# Altium PCB Main.PcbDoc
Units mil, origin at the board's own origin, x right, y up, seen from the top; angles counter-clockwise.
Board outline 6000 x 4000 mil, 2 copper layers (Top Layer, Bottom Layer); 6 components, 5 nets, 14 pads, 0 vias.
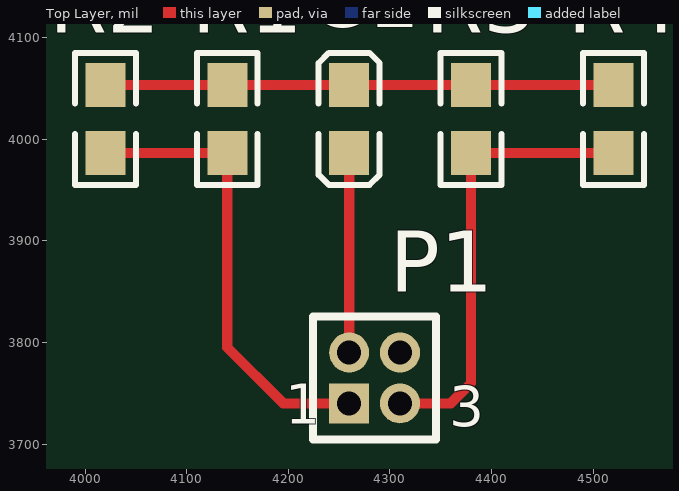
[diagram p0: Top Layer view]
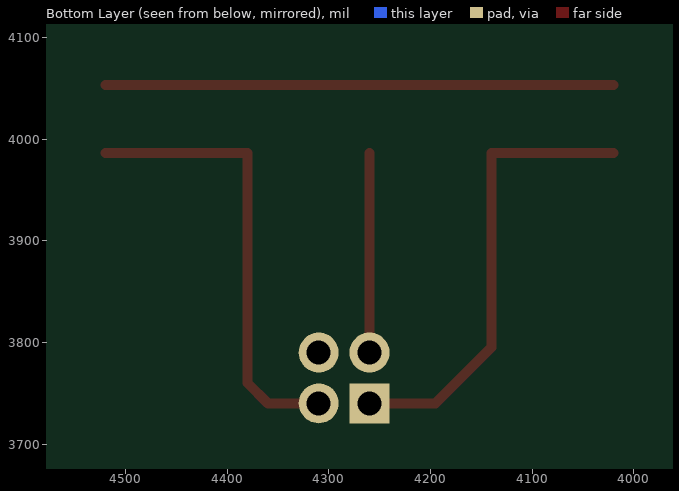
[diagram p1: Bottom Layer view, seen from below]

## Layer stack, top to bottom
Top Layer: signal copper 1.4
Dielectric: dielectric 12.6, FR-4, Dk 4.8
Bottom Layer: signal copper 1.4

## Board outline
1000,1000 7000,1000 7000,5000 1000,5000

## Design rules (kind name [scope] priority, off if disabled: settings)
Clearance [All] p1: gap=10
PolygonConnect [All] p1: connectstyle=Relief reliefconductorwidth=10 reliefentries=4 polygonreliefangle="90 Angle"
RoutingVias [All] p1: holewidth=28 width=50 viastyle="Through Hole" minholewidth=28 minwidth=50 maxholewidth=28 maxwidth=50
SilkscreenOverComponentPads [All] p1: minsilkscreentomaskgap=10
SolderMaskExpansion [All] p1: expansion=4
Width [All] p1: maxlimit=10 minlimit=10 preferedwidth=10
27 further rules are at their usual default settings.

## Components (designator, comment, footprint, x,y, rotation, side; value= is the part's Value field where it differs from the comment)
C1 "10nF" CC0603 4260,4020 r90 top
P1 "MHDR2X2" MHDR2X2 4260,3740 r0 top
R1 "120R" R0603 4140,4020 r90 top
R2 "120R" R0603 4020,4020 r90 top
R3 "120R" R0603 4380,4020 r270 top
R4 "120R" R0603 4520,4020 r270 top

## Footprints (in the part's own frame and the unit in brackets; to place one, negate y for a bottom-side part, rotate by r counter-clockwise, add the part's x,y. Pads: shape width x height; smd on the part's side, far side on the other; paste and mask are expansions set on the pad)
CC0603 [mm] "Chip Capacitor; Body 1.6 x 0.8 mm (LxW typ)"
  rect 1.1x1 smd: 1(-0.85,0) 2(0.85,0)
  silkscreen extent -1.65,-0.76 1.65,0.76, body extent -1.5,-0.6 1.5,0.6, height 1.35
MHDR2X2 [mm] "Connector; Header; 2x2 Position"
  rect 1x1 hole 0.6: 1(0,0)
  round 1 hole 0.6: 2(0,1.27) 3(1.27,0) 4(1.27,1.27)
  silkscreen extent -0.9,-0.9 2.17,2.17
R0603 [mm] "Chip Resister; Body 1.6 x 0.8 mm (LxW typ)"
  rect 1.1x1 smd: 1(-0.85,0) 2(0.85,0)
  silkscreen extent -1.65,-0.76 1.65,0.76, body extent -1.5,-0.6 1.5,0.6, height 1.35

## Part data
C1: library part 10nF_CC0603, "0603 Capacitor"
P1: "Header, 2-Pin, Dual row"
R1 R2 R3 R4: library part 120R_R0603, "0603 Resistor"

## Nets (pads, with @x,y where several pads share a name; then routed paths per layer and width w, separated by ;. In a path a pad name is that pad's centre, name@x,y a point inside that pad or via, vN(x,y) a via of type N, cw(c..) or ccw(c..) an arc to the next point about the centre after c; other vN are vias at no path point)
CANH: P1.1 R1.1 R2.1 | length 454.3
  Top Layer w10: R2.1 R1.1 4140,3795 4195,3740 P1.1
CANL: P1.3 R3.2 R4.2 | length 444.8
  Top Layer w10: P1.3 4360,3740 4380,3760 R3.2 R4.2
GND: C1.1 P1.2 | length 196.5
  Top Layer w10: P1.2 C1.1
NetC1_2: C1.2 R1.2 R2.2 R3.1 R4.1 | length 500
  Top Layer w10: R2.2 R1.2 C1.2 R3.1 R4.1
V_IN: P1.4

## Text inside footprints (layer, text, board x,y; h text height)
P1: Top Overlay "1" at 4197.01,3720 h39.37; Top Overlay "3" at 4358.43,3717.26 h39.37